# Altium PCB SistemaMonitoreo.PcbDoc
Units mm, origin at the board's own origin, x right, y up, seen from the top; angles counter-clockwise.
Board outline 91.06 x 89.92 mm, 2 copper layers (Top Layer, Bottom Layer); 45 components, 49 nets, 220 pads, 37 vias.
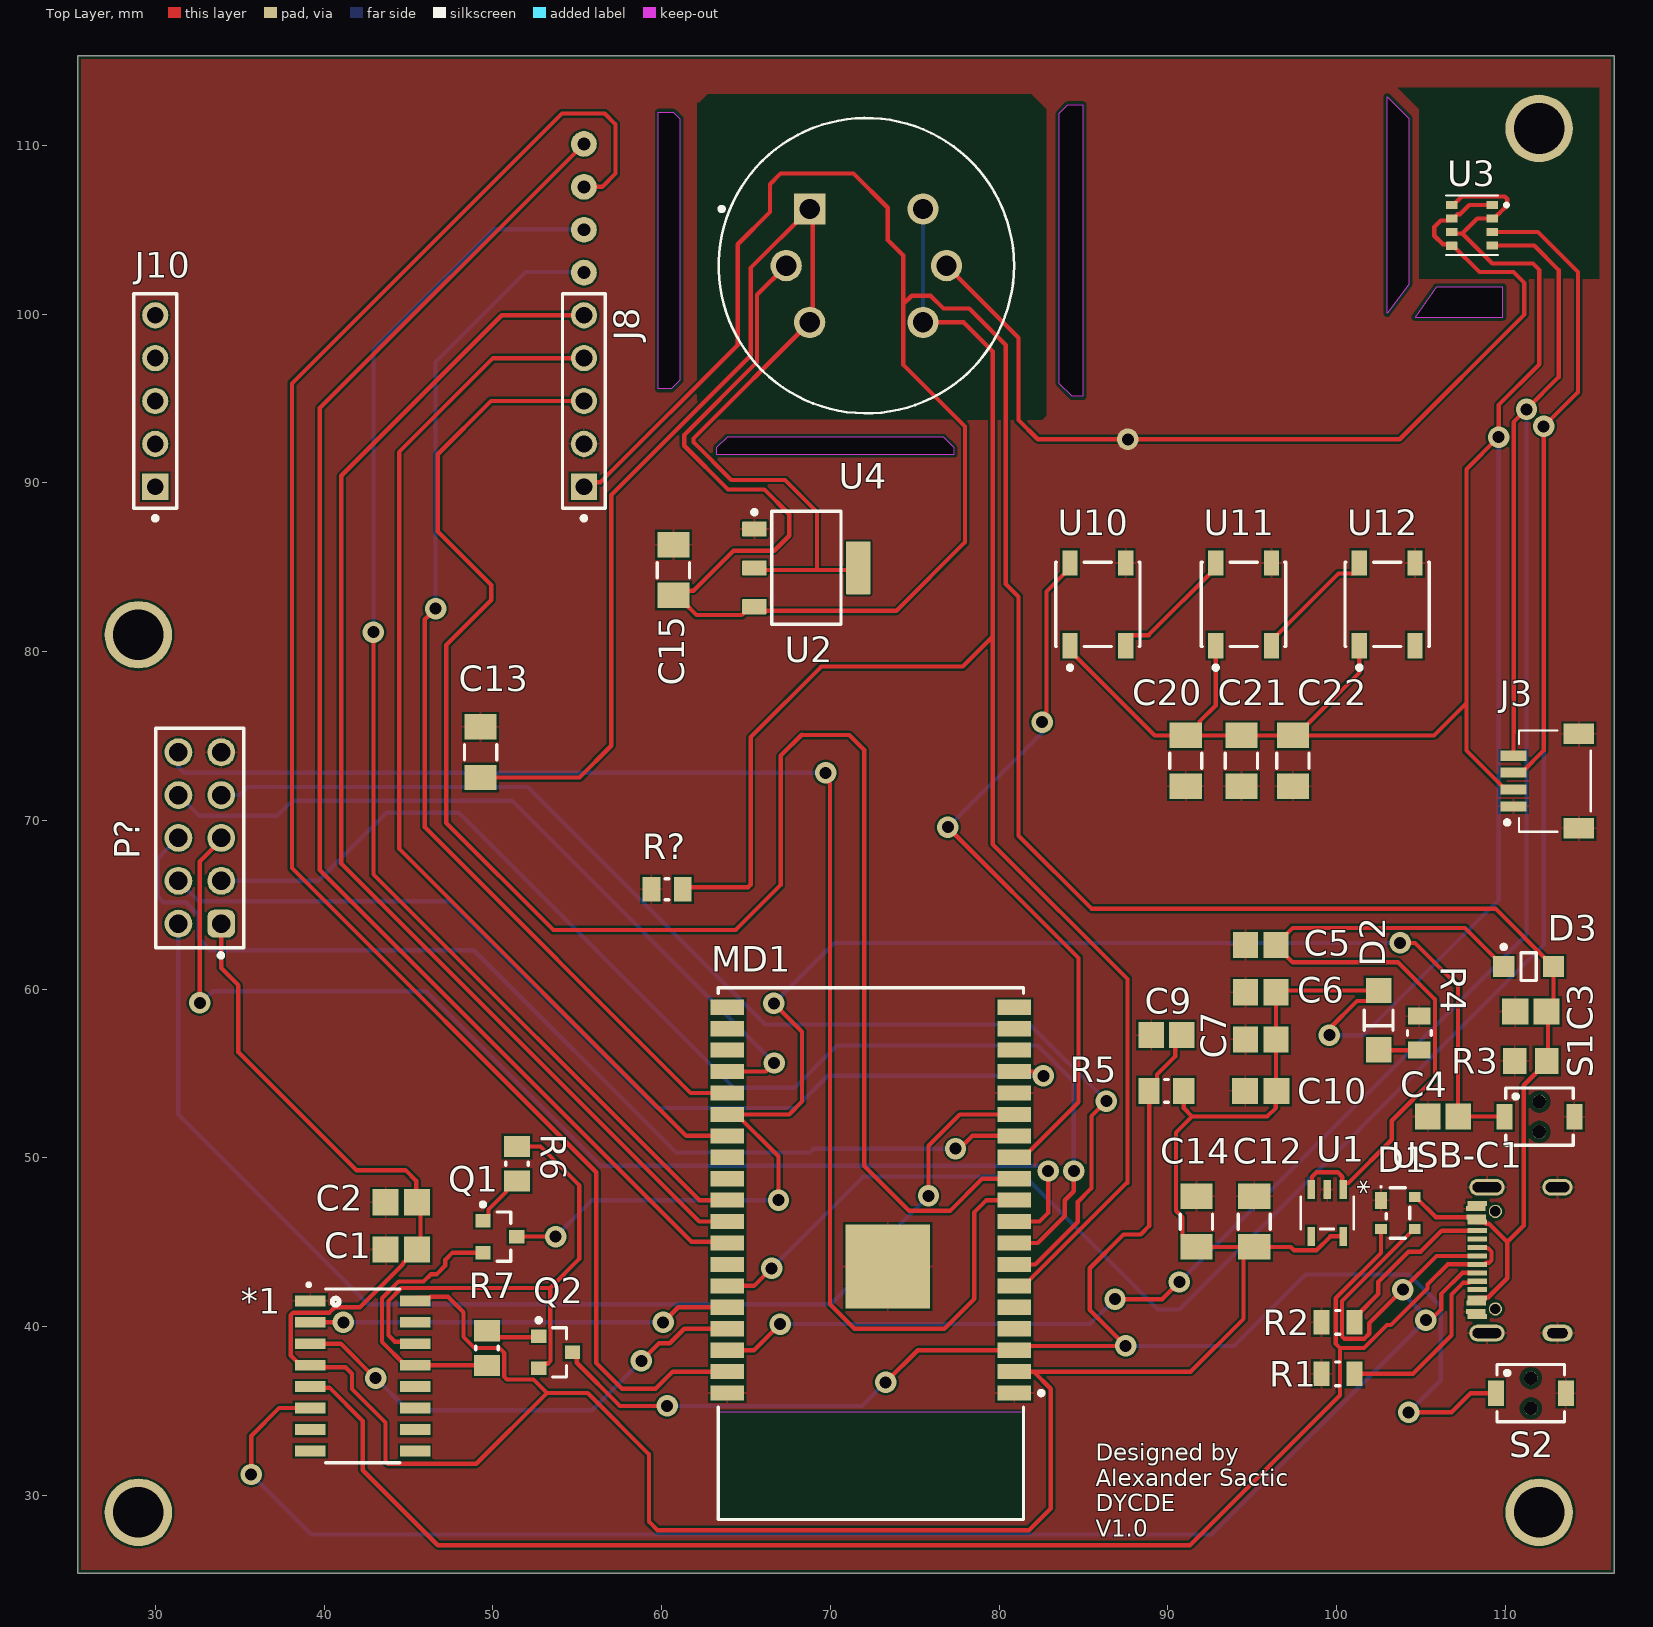
[diagram p0: Top Layer view]
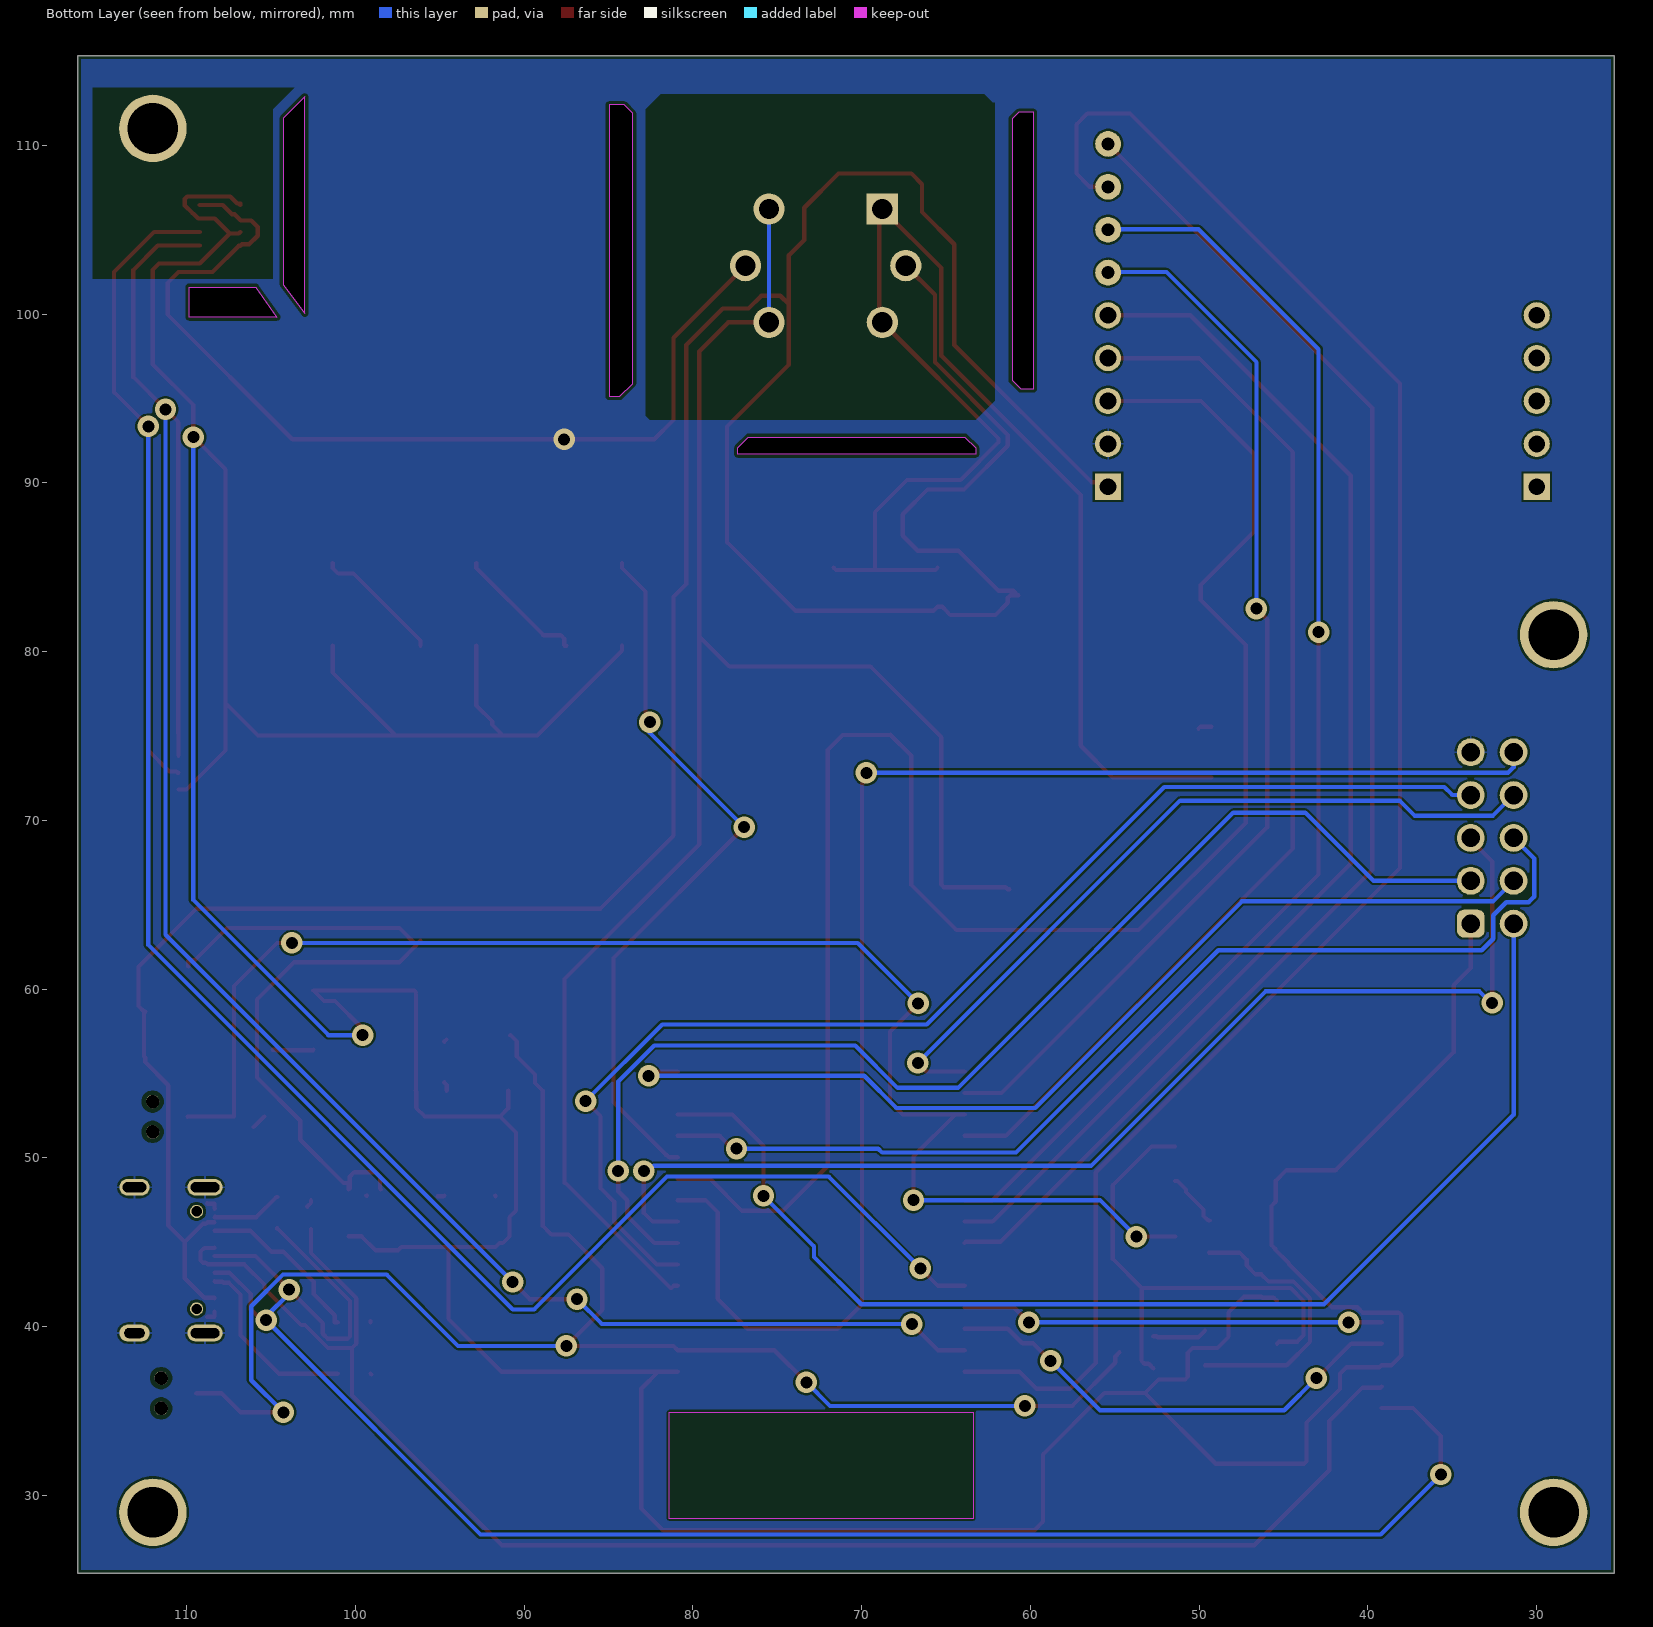
[diagram p1: Bottom Layer view, seen from below]
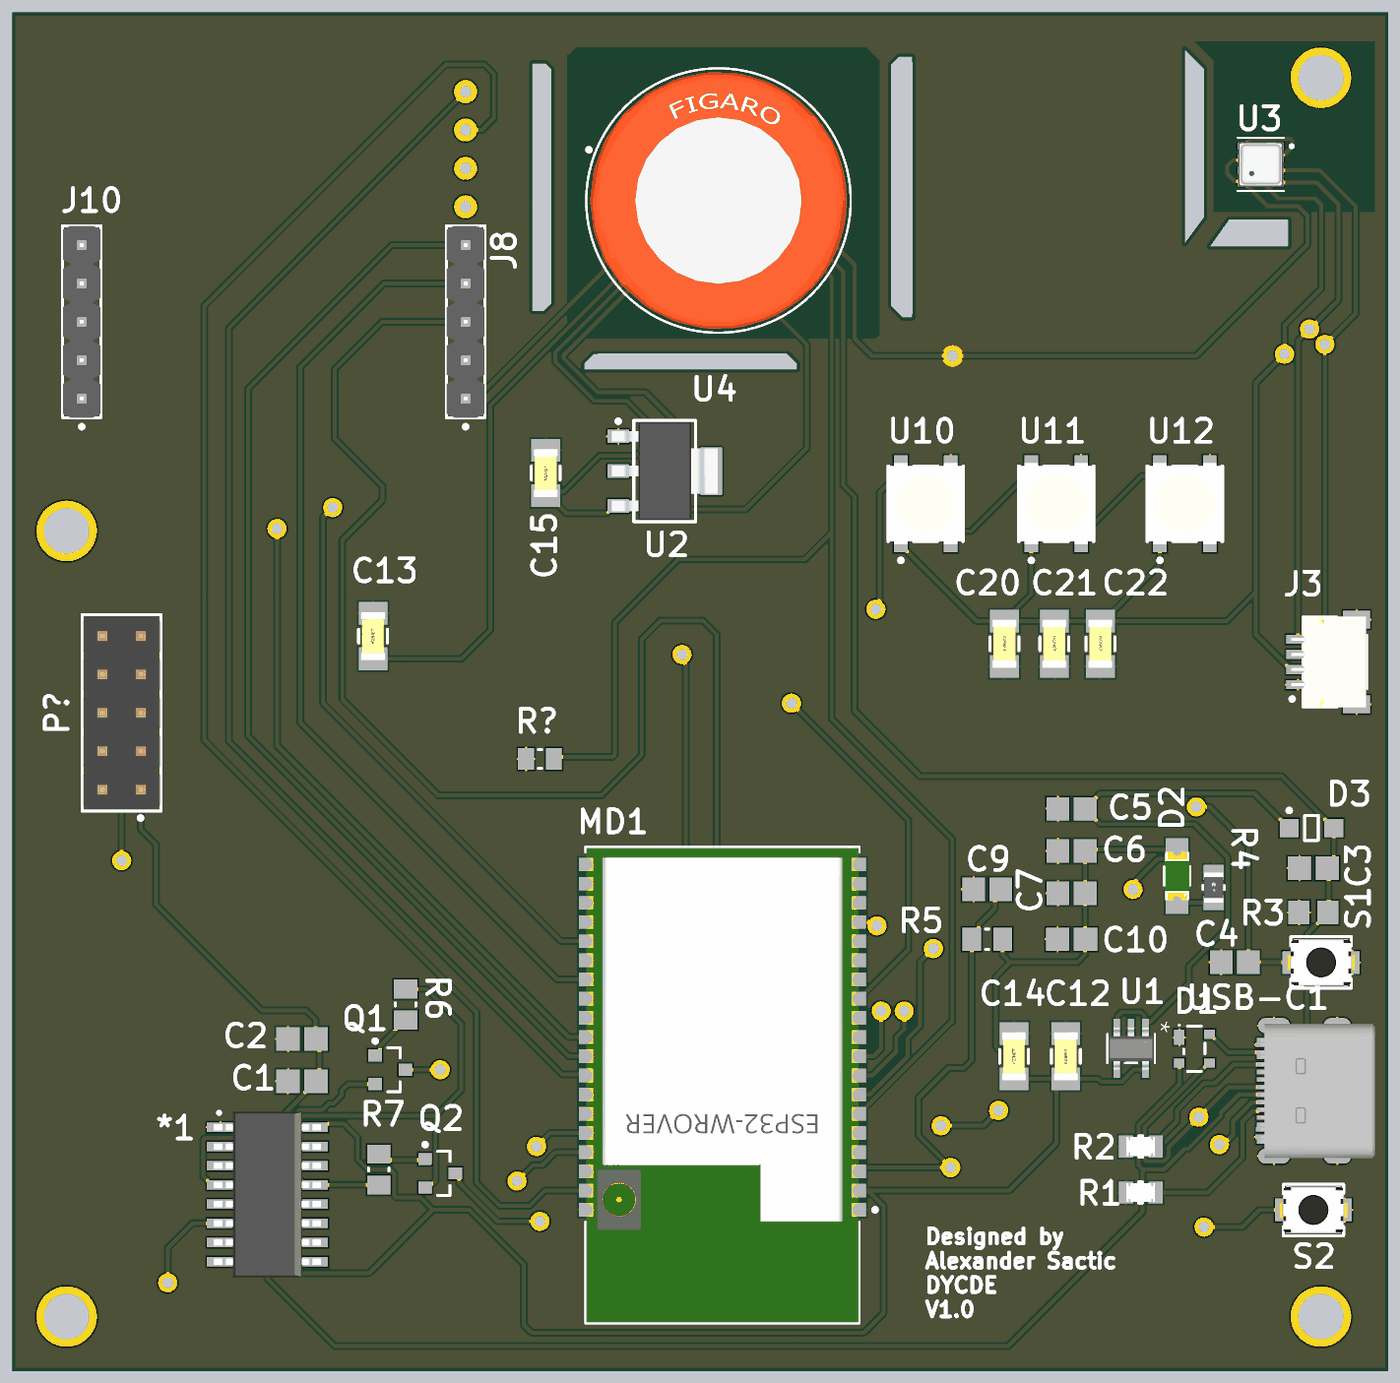
[diagram p2: 3D render of the assembled board from above, using the file's embedded part models]

## Layer stack, top to bottom
Top Solder: solder mask 0.0102, Solder Resist, Dk 3.5
Top Layer: signal copper 0.0356
Dielectric 1: dielectric 0.32, FR-4, Dk 4.8
Bottom Layer: signal copper 0.0356
Bottom Solder: solder mask 0.0102, Solder Resist, Dk 3.5

## Board outline
25.4,25.4 116.459,25.4 116.459,115.316 25.4,115.316
cut-out: 83.566,111.887 84.074,112.395 84.963,112.395 84.963,95.123 84.328,95.123 83.566,95.885
cut-out: 105.918,101.6 104.648,99.822 109.855,99.822 109.855,101.6
cut-out: 63.881,92.71 63.246,92.075 63.246,91.694 77.343,91.694 77.343,92.075 76.708,92.71 76.454,92.71
cut-out: 102.997,112.878 104.267,111.608 104.267,101.752 102.997,100.047
cut-out: 59.817,111.95 60.706,111.95 61.087,111.569 61.087,96.075 60.706,95.694 60.579,95.567 59.817,95.567

## Design rules (kind name [scope] priority, off if disabled: settings)
BoardOutlineClearance [All] p1: gap=0.2 ignorepadtopadclearanceinfootprint=FALSE
Clearance [All] p1: gap=0.127 ignorepadtopadclearanceinfootprint=FALSE except(0.25: Arc-Hole Track-Hole SMDPad-Hole THPad-Hole Via-Hole Fill-Hole Poly-Hole Region-Hole Text-Hole)
ComponentClearance [All] p1: gap=0.127 collisioncheckmode=3 verticalgap=0.127 showdistances=TRUE
DiffPairsRouting [All] p1: maxlimit=0.254 minlimit=0.127 mostfreqgap=0.127 toplayer_minwidth=0.127 toplayer_maxwidth=25.4 toplayer_prefwidth=0.127 bottomlayer_minwidth=0.127 bottomlayer_maxwidth=25.4 bottomlayer_prefwidth=0.127 maxuncoupledlength=12.7
Height [All] p1: minheight=0 maxheight=1816.048 prefheight=12.7
HoleSize [All] p1: absolutevalues=TRUE maxlimit=6.3 minlimit=0.3 maxpercent=80.000 minpercent=20.000
HoleToHoleClearance [All] p1: gap=0.25 allowstackedmicrovias=FALSE
MinimumAnnularRing [All] p1: minimumring=0.076
MinimumSolderMaskSliver [All] p1: minsoldermaskwidth=0
PlaneClearance [All] p1: clearance=0.127
PlaneConnect PlaneConnectPowerPads [InPadClass('PowerPads')] p1: planeconnectstyle=Direct reliefexpansion=0.508 reliefentries=4 reliefconductorwidth=0.254 reliefairgap=0.254
PlaneConnect [All] p2: pad.planeconnectstyle=Relief pad.reliefexpansion=0.3 pad.reliefentries=4 pad.reliefconductorwidth=0.127 pad.reliefairgap=0.127 via.planeconnectstyle=Direct via.reliefexpansion=0.3 via.reliefentries=4 via.reliefconductorwidth=0.127 via.reliefairgap=0.127
PolygonConnect PolygonConnectPowerPads [All vs (InPadClass('PowerPads'))] p1: connectstyle=Direct reliefconductorwidth=0.254 reliefentries=4 polygonreliefangle="90 Angle" airgapwidth=0.254
PolygonConnect [All] p2: thpad.connectstyle=Relief thpad.reliefconductorwidth=0.127 thpad.reliefentries=4 thpad.polygonreliefangle="90 Angle" thpad.airgapwidth=0.127 smdpad.connectstyle=Relief smdpad.reliefconductorwidth=0.127 smdpad.reliefentries=4 smdpad.polygonreliefangle="90 Angle" smdpad.airgapwidth=0.127 via.connectstyle=Direct via.reliefconductorwidth=0.127 via.reliefentries=4 via.polygonreliefangle="90 Angle" via.airgapwidth=0.127
RoutingVias [All] p1: holewidth=0.3 width=0.6 viastyle="Through Hole" minholewidth=0.3 minwidth=0.6 maxholewidth=0.6 maxwidth=6.6
SilkToSilkClearance [All] p1: silktosilkclearance=0
SilkToSolderMaskClearance [IsPad] p1: minsilkscreentomaskgap=0.127 clearancetoexposedcopper=TRUE
SolderMaskExpansion [All] p1: expansion=0.075 istentingtop=FALSE
Width [All] p1: maxlimit=25.4 minlimit=0.127 preferedwidth=0.127 minimp=50.000000 maximp=50.000000 favimp=50.000000
20 further rules are at their usual default settings.

## Classes and differential pairs
component class Main: J8 J10
component class Designator: *1 C1 C2 C3 C4 C5 C6 C7 C9 C10 D1 D2 D3 J3 MD1 P? Q1 Q2 R1 R2 R3 R4 R5 R6 R7 S1 S2 U1 USB-C1

## Components (designator, comment, footprint, x,y, rotation, side; value= is the part's Value field where it differs from the comment)
*1 "CH340B" CH340B 42.291,37.084 r0 top
C1 "0.1 uF" CAPC2013X94X50ML20T25 44.577,44.577 r0 top
C2 "08055C104KAT2A" CAPC2013X94X50ML20T25 44.577,47.371 r0 top
C3 "08055C104KAT2A" CAPC2013X94X50ML20T25 111.506,58.674 r0 top
C4 "1µF" CAPC2013X145X50ML20T25 106.299,52.451 r0 top
C5 "10µF" CAPC2013X140X50ML20T25 95.504,62.611 r0 top
C6 "10µF" CAPC2013X140X50ML20T25 95.504,59.817 r0 top
C7 "1µF" CAPC2013X145X50ML20T25 95.504,57.023 r0 top
C9 "10µF" CAPC2013X145X50ML20T25 89.916,57.277 r0 top
C10 "0.1 uF" CAPC2013X94X50ML20T25 95.504,53.975 r0 top
C12 "C1206C102KGRACTU" FP-C1206C-EF-IPC_A 95.123,46.228 r90 top
C13 "C1206C102KGRACTU" FP-C1206C-EF-IPC_A 49.276,74.041 r90 top
C14 "C1206C102KGRACTU" FP-C1206C-EF-IPC_A 91.694,46.228 r90 top
C15 "C1206C102KGRACTU" FP-C1206C-EF-IPC_A 60.706,84.836 r90 top
C20 "C1206C102KGRACTU" FP-C1206C-EF-IPC_A 91.059,73.533 r270 top
C21 "C1206C102KGRACTU" FP-C1206C-EF-IPC_A 94.361,73.533 r270 top
C22 "C1206C102KGRACTU" FP-C1206C-EF-IPC_A 97.409,73.533 r270 top
D1 "PRTR5V0U2X,215" NXP-SOT143B-4_V 103.632,46.736 r0 top
D2 "HSMG-C150" FP-HSMG-C150-MFG 102.489,58.166 r90 top
D3 "MBR120ESFT1G" ONSC-SOD-123FL-2-498_V 111.379,61.341 r0 top
J3 "SM04B-SRSS-TB(LF)(SN)" JST_SM04B-SRSS-TB(LF)(SN) 110.484,72.328 r90 top
J8 "90120-0125" FP-90120-0125-MFG 55.4,94.85 r90 top
J10 "90120-0125" FP-90120-0125-MFG 30,94.85 r90 top
MD1 "ESP32-WROVER-I" FP-ESP32-WROVER-I-MFG 72.399,44.328 r180 top
P? "61301021121" 61301021121 32.639,68.961 r90 top
Q1 "MMBT2222ALT1G" ONSC-SOT-23-3-318-08_V 50.419,45.339 r0 top
Q2 "MMBT2222ALT1G" ONSC-SOT-23-3-318-08_V 53.721,38.481 r0 top
R1 "5.1K" FP-CRCW0805-e3-MFG 100.076,37.211 r0 top
R2 "5.1K" FP-CRCW0805-e3-MFG 100.076,40.259 r0 top
R3 "100k" RESC2013X60X40ML20T25 111.506,55.753 r0 top
R4 "RP73D2A80R6BTG" FP-RP732A-MFG 104.902,57.404 r270 top value=80.6Ω
R5 "10 k" RESC2013X60X30ML20T20 89.916,53.975 r0 top
R6 "10 k" RESC2013X60X30ML20T20 51.435,49.657 r90 top
R7 "10 k" RESC2013X60X30ML20T20 49.657,38.735 r270 top
R? "RK73B2ATTD103J" RESC2013X60X30NL20T20 60.325,65.913 r0 top
S1 "IO0" SMT_SW_PTS_820 112.014,52.44 r0 top
S2 "PTS820J25MSMTRLFS" SMT_SW_PTS_820 111.506,36.057 r0 top
U1 "XC6210B332MR-G" SOT-25_TOR-M 99.441,46.742 r270 top
U2 "LM1117MPX-3.3/NOPB" DCY0004A_L 68.58,84.963 r0 top
U3 "BME688" BME680 105.48,102.724 r0 top
U4 "TGS822" FP-TGS822-MFG 72.136,102.87 r0 top
U10 "1655" ADA-RGB-1655_V 85.852,82.804 r90 top
U11 "1655" ADA-RGB-1655_V 94.488,82.804 r90 top
U12 "1655" ADA-RGB-1655_V 102.997,82.804 r90 top
USB-C1 "U262-161N-4BVC11" U262-161N-4BVC11 112.014,43.942 r90 top locked

## Footprints (in the part's own frame and the unit in brackets; to place one, negate y for a bottom-side part, rotate by r counter-clockwise, add the part's x,y. Pads: shape width x height; smd on the part's side, far side on the other; paste and mask are expansions set on the pad)
61301021121 [mm] "Pin Header, pitch 2.54 mm, THT, Vertical, dual row, 10p"
  rrect50% 1.65x1.65 hole 1.1: 1(-5.08,-1.27)
  round 1.65 hole 1.1: 2(-5.08,1.27) 3(-2.54,-1.27) 4(-2.54,1.27) 5(0,-1.27) 6(0,1.27) 7(2.54,-1.27) 8(2.54,1.27) 9(5.08,-1.27) 10(5.08,1.27)
  silkscreen extent -7.08,-2.62 6.5,2.62, body extent -6.35,-2.54 6.35,2.54, height 8.59
ADA-RGB-1655_V [mm] "SMD, 4-Leads, Body 5x5mm"
  rect 1.5x0.9 smd: 1(-2.45,1.65) 2(-2.45,-1.65) 3(2.45,-1.65) 4(2.45,1.65)
  silkscreen extent -3.87,-2.5 2.5,2.5, body extent -2.7,-2.5 2.7,2.5, height 1.68
BME680 [mm]
  rrect25% 0.686x0.5 smd: 1(3.74,3.74) 2(3.74,2.94) 3(3.74,2.14) 4(3.74,1.34) 5(1.34,1.32) 6(1.34,2.14) 7(1.34,2.94) 8(1.34,3.74)
  silkscreen extent 1.01,0.77 4.68,4.31, body extent 1.04,1.04 4.04,4.04, height 1
CAPC2013X94X50ML20T25 [mm] "Chip Capacitor, 2-Leads, Body 2.01x1.25mm, IPC Low Density"
  rect 1.55x1.55 smd: 1(-0.925,0) 2(0.925,0)
  body extent -1.1,-0.72 1.11,0.72, height 0.94
CAPC2013X140X50ML20T25 [mm] "Chip Capacitor, 2-Leads, Body 2.00x1.25mm, IPC Low Density"
  rect 1.5x1.55 smd: 1(-0.9,0) 2(0.9,0)
  body extent -1.1,-0.72 1.1,0.72, height 1.4
CAPC2013X145X50ML20T25 [mm] "Chip Capacitor, 2-Leads, Body 2.00x1.25mm, IPC Low Density"
  rect 1.5x1.55 smd: 1(-0.9,0) 2(0.9,0)
  body extent -1.1,-0.72 1.1,0.72, height 1.45
CH340B [mm] "- USB 2.0 Transceiver 2Mbps SOP-16_150mil USB ICs ROHS"
  rect 1.8x0.64 smd: 1(-3.105,4.445) 2(-3.105,3.175) 3(-3.105,1.905) 4(-3.105,0.635) 5(-3.105,-0.635) 6(-3.105,-1.905) 7(-3.105,-3.175) 8(-3.105,-4.445) 9(3.105,-4.445) 10(3.105,-3.175) 11(3.105,-1.905) 12(3.105,-0.635) 13(3.105,0.635) 14(3.105,1.905) 15(3.105,3.175) 16(3.105,4.445)
  silkscreen extent -3.3,-5.15 2.2,5.5, body extent -3.56,-5.51 3.56,5.51, height 2.14
DCY0004A_L [mm] "SOT223, 4-Leads, Body 6.7x3.7mm, Pitch 2.3mm, IPC High Density"
  rrect11% 1.45x0.9 smd: 1(-3.075,2.3) 2(-3.075,0) 3(-3.075,-2.3)
  rrect7% 1.45x3.15 smd: 4(3.075,0)
  silkscreen extent -3.2,-3.35 2.05,3.42, body extent -3.5,-3.25 3.5,3.25, height 1.62
FP-90120-0125-MFG [mm]
  rect 1.55x1.55 hole 1 paste-2539.97 mask+0: 1(-5.08,0)
  round 1.55 hole 1 paste-2539.97 mask+0: 2(-2.54,0) 3(0,0) 4(2.54,0) 5(5.08,0)
  silkscreen extent -7.07,-1.27 6.35,1.27, body extent -6.45,-1.37 6.45,1.37, height 0.25
FP-C1206C-EF-IPC_A [mm]
  rect 1.505x1.906 smd paste+0 mask+0: 1(-1.501,0) 2(1.501,0)
  silkscreen extent -0.45,-0.95 0.45,0.95, body extent -2.75,-1.45 2.75,1.45, height 0.25
FP-CRCW0805-e3-MFG [mm]
  rect 0.95x1.45 smd paste+0 mask+0: 1(-0.975,0) 2(0.975,0)
  silkscreen extent -0.13,-0.7 0.13,0.7, body extent -1.55,-0.82 1.55,0.82, height 0.25
FP-ESP32-WROVER-I-MFG [mm]
  rect 2x0.9 smd paste+0 mask+0: 1(-8.5,8.26) 2(-8.5,6.99) 3(-8.5,5.72) 4(-8.5,4.45) 5(-8.5,3.18) 6(-8.5,1.91) 7(-8.5,0.64) 8(-8.5,-0.63) 9(-8.5,-1.9) 10(-8.5,-3.17) 11(-8.5,-4.44) 12(-8.5,-5.71) 13(-8.5,-6.98) 14(-8.5,-8.25) 15(-8.5,-9.52) 16(-8.5,-10.79) 17(-8.5,-12.06) 18(-8.5,-13.33) 19(-8.5,-14.6) 20(8.5,-14.6) 21(8.5,-13.33) 22(8.5,-12.06) 23(8.5,-10.79) 24(8.5,-9.52) 25(8.5,-8.25) 26(8.5,-6.98) 27(8.5,-5.71) 28(8.5,-4.44) 29(8.5,-3.17) 30(8.5,-1.9) 31(8.5,-0.63) 32(8.5,0.64) 33(8.5,1.91) 34(8.5,3.18) 35(8.5,4.45) 36(8.5,5.72) 37(8.5,6.99) 38(8.5,8.26)
  rect 5x5 smd paste+0 mask+0: 39(-1,0.76)
  Keep-Out Layer region: -9,9.4 9,9.4 9,15.7 -9,15.7
  Keep-Out Layer region: -9,9.4 9,9.4 9,15.7 -9,15.7
  silkscreen extent -10.23,-15.75 9.05,15.75, body extent -9.6,-15.85 9.6,15.85, height 0.25
FP-HSMG-C150-MFG [mm]
  rect 1.5x1.5 smd paste+0 mask+0: 1(-1.75,0) 2(1.75,0)
  silkscreen extent -0.6,-0.85 0.6,0.85, body extent -2.6,-0.95 2.6,0.95, height 0.25
FP-RP732A-MFG [mm]
  rect 1x1.35 smd paste+0 mask+0: 1(-1,0) 2(1,0)
  silkscreen extent -0.13,-0.7 0.13,0.7, body extent -1.6,-0.8 1.6,0.8, height 0.25
FP-TGS822-MFG [mm]
  rect 1.85x1.85 hole 1.2 paste-2539.97 mask+0: 1(-3.359,3.359)
  round 1.85 hole 1.2 paste-2539.97 mask+0: 2(-4.75,0) 3(-3.359,-3.359) 4(3.359,-3.359) 5(4.75,0) 6(3.359,3.359)
  silkscreen extent -8.75,-8.75 8.75,8.75, body extent -8.85,-8.85 8.85,8.85, height 0.25
JST_SM04B-SRSS-TB(LF)(SN) [mm]
  rect 0.6x1.55 smd: 1(-1.5,0) 2(-0.5,0) 3(0.5,0) 4(1.5,0)
  rect 1.2x1.8 smd: S1(-2.8,-3.875) S2(2.8,-3.875)
  silkscreen extent -3,-4.57 3,0.48, body extent -3,-4.5 3,0.45, height 2.98
NXP-SOT143B-4_V [mm] "SOT143, 4-Leads, Body 3x1.4mm"
  rect 0.7x1 smd: 1(-1,0.75)
  rect 0.7x0.6 smd: 2(-1,-0.95) 3(1,-0.95) 4(1,0.95)
  silkscreen extent -1.05,-1.5 0.7,1.6, body extent -0.7,-1.5 0.7,1.5, height 1.1
ONSC-SOD-123FL-2-498_V [mm] "SOD, 2-Leads, Body 2.7x1.65mm"
  rect 1.25x1.22 smd: 1(-1.475,0) 2(1.475,0)
  silkscreen extent -1.6,-0.82 0.45,1.28, body extent -1.35,-0.82 1.35,0.82, height 0.98
ONSC-SOT-23-3-318-08_V [mm] "SOT23, 3-Leads, Body 2.92x1.3mm, Pitch 0.95mm"
  rect 0.9x0.8 smd: 1(-1,0.95) 2(-1,-0.95) 3(1,0)
  silkscreen extent -1.12,-1.46 0.65,2.02, body extent -0.65,-1.46 0.65,1.46, height 1.11
RESC2013X60X30ML20T20 [mm] "Chip Resistor, 2-Leads, Body 2.00x1.25mm, IPC Low Density"
  rect 1.25x1.55 smd: 1(-1.025,0) 2(1.025,0)
  silkscreen extent -0.1,-0.67 0.1,0.67, body extent -1.1,-0.72 1.1,0.72, height 0.6
RESC2013X60X30NL20T20 [mm] "Chip Resistor, 2-Leads, Body 2.00x1.25mm, IPC Medium Density"
  rect 1.05x1.45 smd: 1(-0.925,0) 2(0.925,0)
  silkscreen extent -0.1,-0.62 0.1,0.62, body extent -1.1,-0.72 1.1,0.72, height 0.6
RESC2013X60X40ML20T25 [mm] "Chip Resistor, 2-Leads, Body 2.00x1.25mm, IPC Low Density"
  rect 1.4x1.55 smd: 1(-0.95,0) 2(0.95,0)
  body extent -1.1,-0.72 1.1,0.72, height 0.6
SMT_SW_PTS_820 [mm]
  rect 0.95x1.5 smd: 1(-2.075,0) 2(2.075,0)
  round 0.8 hole 0.8 unplated: MH1(0,0.9) MH2(0,-0.9)
  silkscreen extent -2,-1.7 2,1.7, body extent -2.25,-1.55 2.25,1.55, height 2.05
SOT-25_TOR-M [mil]
  rect 44.5x17 smd paste+0 mask+0: 1(-54.75,37.4) 2(-54.75,0) 3(-54.75,-37.4) 4(54.75,-37.4) 5(54.75,37.4)
  silkscreen extent -38,-62 38,62, body extent -55,-57 55,57, height 51
U262-161N-4BVC11 [mm] "USB-C"
  rect 0.3x1.15 smd: A1(-3.35,3.67) A4(-2.55,3.734) A5(-1.25,3.67) A6(-0.25,3.67) A7(0.25,3.67) A8(1.25,3.67) A9(2.55,3.734) A12(3.35,3.67) B1(3.05,3.764) B4(2.25,3.67) B5(1.75,3.67) B6(0.75,3.67) B7(-0.75,3.67) B8(-1.75,3.67) B9(-2.25,3.67) B12(-3.05,3.764)
  rrect100% 1x1.8 hole 1.2 slot 0.6 at 0 deg: S1(-4.32,-1.075)
  rrect100% 1x1.8 on Top Paste: S1(-4.318,-1.092) S1(4.318,-1.067)
  rrect100% 1x2.1 hole 1.7 slot 0.6 at 0 deg: S2(-4.32,3.105) S3(4.32,3.105)
  rrect100% 1x2.1 on Top Paste: S2(-4.318,3.124) S2(4.318,3.124)
  rrect100% 1x1.8 hole 1.4 slot 0.6 at 0 deg: S4(4.32,-1.075)
  round 0.78 / inner round 0 / far side round 0.78 hole 0.61: Un1(2.89,2.605)
  round 0.78 / inner round 0.65 / far side round 0.78 hole 0.61: Un2(-2.89,2.605)
  body extent -4.45,-3.55 4.45,4.01, height 3.33

## Part data
*1: "- USB 2.0 Transceiver 2Mbps SOP-16_150mil USB ICs ROHS", ComponentLink1Description=Datasheet, ComponentLink1URL=https://www.mpja.com/download/35227cpdata.pdf
C1 C2 C3 C10: library part CMP-2000-05016-1, "Chip Capacitor, Ceramic, 0.1 uF, 10%, 50 V, 0805, RoHS, Tape and Reel", Capacitance=100nF, Case Size/Dimension=0805, Dielectric=X7R, Manufacturer=AVX, Rated Voltage=50V, Tolerance (%)=±10%, Datasheet URL=http://www.farnell.com/datasheets/319609.pdf, Datasheet Version=Sep-07, Manufacturer URL=http://www.avx.com/
C4 C7 C9: library part CMP-2007-01082-1, "1µF ±10% 16V Ceramic Capacitor X7R 0805 (2012 Metric)", Manufacturer=Kemet, Part Number=C0805C105K4RAC7800
C5 C6: library part CMP-2007-03242-1, "10µF ±10% 16V Ceramic Capacitor X5R 0805 (2012 Metric)", Part Number=CL21A106KOQNNNG
C12 C13 C14 C15 C20 C21 C22: library part CMP-03020-034681-1, "CAP CER 1000PF 2KV X7R 1206", Capacitance=1nF, Case Code (Imperial)=1206, Case Code (Metric)=3216, Dielectric=X7R, Dielectric Material=Ceramic, Max Operating Temperature=125°C, Min Operating Temperature=-55°C, Package Quantity=1, Tolerance=10%, Voltage=2kV, Voltage Rating (DC)=2.5kV, Case/Package=1206, Construction=Flat, Depth=1.6mm, Dissipation Factor=2.5%, Height=1.6mm, Length=3.2mm, Mount="Surface Mount", Number of Pins=2, Packaging="Tape and Reel", Radiation Hardening=No, REACH SVHC="No SVHC", RoHS Compliant=Yes, Series=C, Termination=SMD/SMT, Thickness=0.069inch, Voltage Rating=2kV, Width=0.063inch
D1: library part CMP-2000-05285-1, "Ultra Low Capacitance Double Rail-to-Rail ESD Protection Diode, 5.5 V, 1 pF, -40 to 85 degC, 4-Pin SOT143B, RoHS, Tape and Reel", Capacitance Value=16pF, ESD Protection Voltage=8KV@ContactDisc, Leakage Current=0.1uA, Manufacturer="NXP Semiconductors", Operating Temp Range=-40Cto85C, Operating Temperature Classification=Industrial, Operating Temperature Max Deg. C=85C, Operating Temperature Min Deg. C=-40C, Package / Case=SOT, Reverse Breakdown Voltage=6V, Reverse Stand-off Voltage=5.5V, Configuration=Quad, Datasheet URL=https://datasheet.ciiva.com/4479/prtr5v0u2x-102853-4479461.pdf, Datasheet Version="Rev. 02, 01/2008", Direction Type=Uni-Directional, Leakage Current (Max)=0.1uA, Manufacturer URL=http://www.nxp.com/, Mounting=SurfaceMount, Mounting Style=SurfaceMount, Number of Elements=1, Package Type=SOT, Packaging=TapeandReel, Pin Count=3+Tab, Polarity=Uni-Directional, Product Depth (mm)=1.4mm, Product Height (mm)=1mm, Product Length (mm)=3mm, Rad Hardened=No, Suppressor Type=DiodeArrays, Working Voltage=5.5V, Working Voltage (Max)=5.5V
D2: library part CMP-2000-05061-2, "LED GREEN DIFFUSED 1206 SMD", Colour=Green, Forward Current=20mA, Forward Voltage=2.2V, Manufacturer=Broadcom, Max Junction Temp=+95°C, Power Dissipation=65mW, Reverse Voltage=5V, Temperature="-40°C to +85°C", Temperature Range High=+85°C, Temperature Range Low=-40°C, Automotive=No, Category=Diode, ComponentLink2Description=Datasheet, ComponentLink2URL=https://docs.broadcom.com/docs/AV02-0551EN, Device Class L1=Optoelectronics, Device Class L2=LEDs, Device Class L3=unset, Digikey Description="LED GREEN DIFFUSED 1206 SMD", Height=1.2mm, Ipc Land Pattern Name=DIOCP320160X55, Lead Free=Yes, Led Orientation="Top View", Luminous Intensity=15mcd, Manufacturer Part Number=HSMG-C150, Mouser Description="LED Uni-Color Green 570nm 2-Pin Chip LED T/R", Octopart=https://octopart.com/hsmg-c150-broadcom-71131304, Package=HSMG-C150, Peak Emmision Wavelength=570nm, RoHS=TRUE, Viewing Angle=170°, Wavelength=572nm
D3: library part CMP-1055-00434-1, "Schottky Power Rectifier, 2-Pin SOD-123, Pb-Free, Tape and Reel", Manufacturer="On Semiconductor", ComponentLink1Description="Manufacturer URL", ComponentLink1URL=http://www.onsemi.com/, ComponentLink2Description=Datasheet, ComponentLink2URL=http://www.onsemi.cn/pub_link/Collateral/MBR120ESFT1-D.PDF, ComponentLink3Description="Package Specification", ComponentLink3URL=http://www.onsemi.com/pub_link/Collateral/498-01.PDF, Configuration=Single, DatasheetVersion="Rev. 4", IFSM Max (A)=40, Mounting Technology="Surface Mount", PackageDescription="2-Pin SOD, Body 1.65 x 2.7 mm", PackageReference=SOD-123FL-2-498, PackageVersion="Rev. D, 05/2013", Packing="Tape and Reel", PartNumber=MBR120ESFT1G, RoHS=TRUE
J3: "Connector Header Surface Mount, Right Angle 4 position 0.039 _1.00mm_", Package=None, Availability=Unavailable, MF="JST Sales", MP=SM04B-SRSS-TB_LF__SN_, Price=None, SnapEDA_Link=https://www.snapeda.com/parts/SM04B-SRSS-TB%28LF%29%28SN%29/JST%20Sales%20America%20Inc./view-part/557466/?ref=snap
J8 J10: library part CMP-00257-00655425-1, "90120-0125 2.54mm Pitch C-Grid III Header, Single Row, Vertical, 5 Circuits, Tin (Sn) Plating", Contact Resistance=20mΩ, Current Rating=3A, Housing Color=Black, Manufacturer Lifecycle Status=ACTIVE, Max Operating Temperature=125°C, Max Voltage Rating (DC)=350.35kV, Min Operating Temperature=-55°C, Voltage Rating=350V, Contact Gender=Male, Contact Material=Brass, Contact Plating=Tin, Country of Origin=SK, Gender=Male, Glow Wire Compliant=Non-compliant, Housing Material=Polyester, Lead Free="Lead Free", Lead Length=2.9mm, Lead Pitch=2.54mm, Lifecycle Status=Production, Mating Post Length=6.75mm, Mount="Through Hole", NexarPartId=655425, Number of Circuits=5, Number of Contacts=5, Number of Pins=5, Number of Positions=5, Number of Rows=1, Orientation=Vertical, Packaging=Bulk, Pitch=2.54mm, Plating=Tin, Radiation Hardening=No, REACH SVHC="No SVHC", RoHS=Compliant, Schedule B=8536694040, Termination=Solder, Voltage Rating (AC)=350V
MD1: library part CMP-194065-000001-1, "SMD MODULE, ESP32-D0WDQ6, 32MBIT", Manufacturer=Espressif, Max Frequency=2484MHz, Max Supply Voltage=3.6V, Min Supply Voltage=2.3V, Nominal Supply Current=500mA, Temperature="-40°C to +85°C", Temperature Range High=+85°C, Temperature Range Low=-40°C, Automotive=No, Category=UNK, ComponentLink2Description=Datasheet, ComponentLink2URL=https://www.espressif.com/sites/default/files/documentation/esp32-wrover_datasheet_en.pdf, Data Rate=150Mbits/s, Device Class L1="Integrated Circuits (ICs)", Device Class L2="RF Semiconductors and Devices", Device Class L3=Transceivers, Digikey Description="SMD MODULE, ESP32-D0WDQ6, 32MBIT", Height=3.4mm, Interface=I2C,SPI,UART,I2S,Other, Lead Free=Yes, Manufacturer Part Number=ESP32-WROVER-I, Number Of Adc Channels=16, Number Of Gpio=20, Octopart=https://octopart.com/esp32-wrover-i-espressif+systems-89171349, Package=ESP32-WROVER-I, RoHS=TRUE, Sensitivity=-98dBm
P?: library part CMP-1502-01084-3, Color=Black, Contact Resistance=20mΩ, Current Rating=3A, Flammability Rating="UL94 V-0", Insulation Resistance=1GΩ, Max Operating Temperature=105°C, Min Operating Temperature=-40°C, Operating Supply Voltage=250V, Connector Type="Male Pin", Contact Gender=Male, Contact Material=Copper, Contact Mating Length=5.9944mm, Contact Plating=Gold, Gender=Male, Height=2.54mm, Housing Material=PBT, Insulation=Insulated, Lead Pitch=2.54mm, Length=12.7mm, Mount="Through Hole", NexarPartId=18818163, Number of Contacts=10, Number of Pins=10, Number of Positions=10, Number of Rows=2, Orientation=Vertical, Packaging=Bulk, Pitch=2.54mm, REACH SVHC=Unknown, RoHS=Compliant, Row Spacing=2.54mm, Termination="Through Hole", Voltage Rating=250V, Width=12.7mm
Q1 Q2: library part CMP-1048-00538-1, "General Purpose Transistor, NPN Silicon, 3-Pin SOT-23, Pb-Free, Tape and Reel", Manufacturer="On Semiconductor", ComponentLink1Description="Manufacturer URL", ComponentLink1URL=http://www.onsemi.com/, ComponentLink2Description=Datasheet, ComponentLink2URL=http://www.onsemi.cn/pub_link/Collateral/MMBT2222LT1-D.PDF, ComponentLink3Description="Package Specification", ComponentLink3URL=http://www.onsemi.cn/pub_link/Collateral/318-08.PDF, DatasheetVersion="Rev. 10", fT Min (MHz)=300, IC Continuous (A)=0.6, Mounting Technology="Surface Mount", PackageDescription="3-Pin Small Outline Transistor, Body 2.92 x 1.3 mm, Pitch 0.95 mm", PackageReference=SOT-23-3-318-08, PackageVersion="Rev. AP, 11/2009", Packing="Tape and Reel", PartNumber=MMBT2222ALT1G, Polarity=NPN, RoHS=TRUE
R1 R2: library part CMP-2001-04024-2, "RES Thick Film, 5.1kΩ, 1%, 0.125W, 100ppm/°C, 0805", Case Code (Imperial)=0805, Case Code (Metric)=2012, Max Operating Temperature=155°C, Max Power Dissipation=125mW, Min Operating Temperature=-55°C, Package Quantity=10, Resistance=5.1kR, Temperature Coefficient=100ppm/°C, Tolerance=1%, Voltage Rating=150V, Case/Package=0805, Composition="Thick Film", Contact Plating=Tin, Depth=1.25mm, Features="Automotive AEC-Q200", Height=0.45mm, Lead Free="Lead Free", Length=2mm, Military Standard=Not, Mount="Surface Mount", Number of Terminations=2, Packaging="Tape and Reel", Power Rating=125mW, Radiation Hardening=No, Termination=SMD/SMT, Voltage Rating (DC)=150V, Weight=0.000194oz, Width=0.049inch
R3: library part CMP-2001-00583-1, "100 kOhms ±0.1% 0.125W, 1/8W Chip Resistor 0805 (2012 Metric) Automotive AEC-Q200 Thin Film", Manufacturer=Panasonic, Part Number=ERA6AEB104V
R4: library part CMP-03211-002377-1, "RESISTOR, 0805 80.6Ω, 0.1% 15ppm/°C", Manufacturer="TE Connectivity", Package=RP732A, Power Rating=0.125W, Resistance=80.6Ω, Temperature="-55°C to 155°C", Temperature Coefficient=15ppm/°C, Temperature Range High=155°C, Temperature Range Low=-55°C, Tolerance=0.1%, Voltage Rating=150V, Automotive=No, Category=Res, ComponentLink2Description=Datasheet, ComponentLink2URL=https://www.te.com/commerce/DocumentDelivery/DDEController?Action=srchrtrv&DocNm=1773272&DocType=DS&DocLang=English, Composition="Thin Film", Device Class L1="Passive Components", Device Class L2=Resistors, Device Class L3="Chip SMD Resistors", Height=0.65mm, Ipc Land Pattern Name=RESC200125X55, Lead Free=Yes, Manufacturer Part Number=RP73D2A80R6BTG, Octopart=https://octopart.com/rp73d2a80r6btg-te+connectivity-42011633, octopart_url=https://octopart.com/rp73d2a80r6btg-te+connectivity-42011633, Packaging="250 cut tape length", RoHS=TRUE, Series=RP73
R5 R6 R7: library part CMP-2001-04657-1, "10 kOhms ±5% 0.25W, 1/4W Chip Resistor 0805 (2012 Metric) Automotive AEC-Q200, Moisture Resistant Thick Film", Manufacturer="KOA Speer", Part Number=RK73B2ATTD103J
R?: library part CMP-2001-04657-1, "RL", Manufacturer="KOA Speer", Part Number=RK73B2ATTD103J
S1: library part PTS820J25MSMTRLFS
U1: "No Description Available", Mfr_Name="Torex Semiconductor", Copyright="Copyright (C) 2022 Ultra Librarian. All rights reserved.", Manufacturer_Part_Number=XC6210B332MR-G, RefDes=RefDes, Type=DEV
U2: library part CMP-0062-01639-4, "800mA Low-Dropout Linear Regulator, 4-pin SOT-223, Pb-Free", Manufacturer="Texas Instruments", PackageTopMarking=XYTT*N05A, PowerWise=N, Code_IPC=SOT223-4, Code_JEDEC=TO-261-AA, ComponentLink1Description="Datasheet URL", ComponentLink1URL=http://www.ti.com/general/docs/lit/getliterature.tsp?genericPartNumber=LM1117-N&fileType=pdf, CompType="LDO IC", High-Reliability=Y, PackageDescription="Molded SOT-223, 6.50 x 3.56 x 1.6mm Body, 4 Lead, 2.3mm Pitch", PackageReference=DCY0004A, PartNumber=LM1117MPX-3.3/NOPB, PinCount=4, RoHS=Y
U3: "Gas sensor measuring relative humidity, barometric pressure, ambient temperature and gas (VOC)", Package=None, Availability=Unavailable, MP=BME688, Price=None
U4: library part CMP-04312-24208239-1, "TGS822 MOS-Type organic solvent vapors sensor; range: 50-5000ppm C2H5OH; supply: 5V; power: 660mW", Case/Package=Radial, Max Supply Voltage=24V, Height=10mm, NexarPartId=24208239, RoHS=Compliant
U10 U11 U12: library part CMP-2000-05026-1, "Intelligent Control LED Integrated Light Source, 3.5 to 5.3 V, -25 to 80 degC, 4-Pin SMD, RoHS, Tape and Reel", Color=Red,Green,Blue(RGB), Manufacturer=Adafruit-Industries-LLC, Package Description="4-Pin Surface Mount Device, Body 5 x 5 mm", Category=Optoelectronics, Configuration=Discrete, Controller Type=-, Datasheet URL=http://datasheet.octopart.com/ADA1655-Adafruit-Industries-datasheet-32028139.pdf, Datasheet Version=May-13, Family=Addressable,Specialty, Interface=-, Manufacturer URL=https://www.adafruit.com/, Mounting Type=SurfaceMount, Number of LEDs=10, Package Reference=1655, Series=Neopixel, Size / Dimension=5.00mmLx5.00mmW, Utilized LED=WS2812(5050)
USB-C1: "USB - Type C Female 16 SMT USB Connectors RoHS", ComponentLink1Description=datasheet, ComponentLink1URL=https://datasheet.lcsc.com/szlcsc/2002271811_XKB-Connectivity-U262-161N-4BVC11_C319148.pdf, ComponentLink2Description="LCSC Link", ComponentLink2URL=https://lcsc.com/product-detail/USB-Connectors_XKB-Connectivity-U262-161N-4BVC11_C319148.html

## Free pads (board coordinates)
  round 1.524 hole 0.762: 2(55.4,110.08) 3(55.4,107.54) 4(55.4,105) 5(55.4,102.46)
  round 4 hole 3: 6(29,29) 6(29,81) 6(112,29) 6(112,111)

## Via types
v1: diameter 1.27, hole 0.711, Top Layer to Bottom Layer, 37 vias

## Nets (pads, with @x,y where several pads share a name; then routed paths per layer and width w, separated by ;. In a path a pad name is that pad's centre, name@x,y a point inside that pad or via, vN(x,y) a via of type N, cw(c..) or ccw(c..) an arc to the next point about the centre after c; other vN are vias at no path point)
3V3: *1.4 *1.16 C1.2 C2.2 C6.2 C7.2 C10.2 C12.1 C14.1 C20.1 C21.1 C22.1 D2.2 J3.2 MD1.2 P?.1 R5.2 U1.5 U3.2 U3.6 U3.8 U10.1 U11.1 U12.1 | length 304.3
  Top Layer w0.254: P?.1 33.909,61.252 34.925,60.236 34.925,56.261 41.91,49.276 44.831,49.276 45.466,48.641 45.466,47.407 C2.2 45.72,47.153 45.72,44.831 45.502,44.613 C1.2 44.681,43.756 44.681,43.697 42.132,41.148 40.64,41.148 40.325,40.833 38.181,40.833 38.032,40.684 38.032,38.293 38.606,37.719 *1.4 39.313,37.592 41.275,37.592 41.656,37.211 41.656,36.31 43.64,34.326 43.64,32.026 43.789,31.877 49.022,31.877 53.213,36.068 ; *1.16 45.589,41.722 46.268,41.722 46.318,41.772 47.346,41.772 48.26,40.858 48.26,39.398 48.923,38.735 50.391,38.735 50.686,38.44 50.686,37.026 50.835,36.877 52.404,36.877 53.213,36.068 ; MD1.2 82.042,37.338 ; U10.1 84.202,80.054 89.222,75.034 C20.1 C20.1@91.26,75.034 ; R5.2 90.941,52.95 91.44,52.451 ; C14.1 91.463,44.958 91.262,44.958 90.868,45.353 90.868,46.49 90.487,46.871 90.487,51.498 91.44,52.451 ; C14.1@91.717,44.727 C12.1@94.488,44.727 ; U11.1 92.838,76.813 91.885,75.86 91.885,75.659 C20.1@91.26,75.034 ; C6.2@96.404,59.679 C7.2 96.404,54 C10.2 96.402,53.948 96.402,52.968 95.885,52.451 91.44,52.451 ; C6.2 96.503,59.916 D2.2 101.866,59.293 101.203,59.293 99.568,57.658 v1(99.568,57.277) ; U1.5 99.631,45.352 98.812,44.533 97.478,44.533 97.283,44.727 C12.1 C12.1@94.488,44.727 ; U12.1 101.347,78.771 C22.1@97.61,75.034 ; U3.6 106.909,104.775 107.442,104.775 ; U3.8 106.82,106.54 106.807,106.553 107.002,106.553 107.417,106.968 109.96,106.968 110.109,106.819 110.109,106.438 109.631,105.96 109.609,105.96 109.313,105.664 U3.2 108.331,105.664 107.442,104.775 ; J3.2 110.009,71.828 107.696,74.141 107.696,76.962 ; 53.213,36.068 55.626,36.068 59.258,32.436 59.258,28.448 59.766,27.94 81.766,27.94 83.058,29.232 83.058,36.322 82.042,37.338 ; 82.042,37.338 91.361,37.338 94.488,40.465 C12.1@94.488,44.727 ; C20.1@91.26,75.034 C21.1 C22.1 C22.1@97.61,75.034 ; C22.1@97.61,75.034 105.768,75.034 107.696,76.962 ; 107.442,104.775 109.22,102.997 111.633,102.997 112.014,102.616 112.014,97.028 109.601,94.615 v1(109.601,92.71) 107.696,90.805 107.696,76.962
  Bottom Layer w0.254: v1(99.568,57.277) 101.6,57.277 109.601,65.278 v1(109.601,92.71)
3V3_Reg: C13.1 U2.2 U2.4 U4.1 U4.3 | length 80.7
  Top Layer w0.254: C13.1 55.141,72.54 57.023,74.422 57.023,89.281 65.278,97.536 65.278,102.025 65.278,102.035 65.278,102.73 U4.1 68.961,106.045 68.961,99.695 61.891,92.625 61.891,92.414 64.135,90.17 67.31,90.17 69.215,88.265 69.215,84.836 ; U2.2 65.632,84.836 69.215,84.836 ; U2.4 71.528,84.836 69.215,84.836
5V_ext: C5.2 D3.1 U1.1 U1.3 | length 43.4
  Top Layer w0.254: C5.2@96.139,62.876 C5.2 ; C5.2@96.404,62.586 97.395,61.595 103.632,61.595 105.831,59.396 105.831,54.767 103.271,52.207 103.271,51.074 100.711,48.514 100.48,48.514 100.391,48.425 U1.1 100.336,48.188 100.336,48.425 100.336,48.889 100.076,49.149 98.806,49.149 98.546,48.889 98.546,48.188 U1.3 ; C5.2@96.404,62.636 97.395,63.627 107.603,63.627 109.508,61.722 109.855,61.722 109.904,61.673 D3.1
CLK: MD1.20
CMD: MD1.19
D+: *1.5 D1.2 USB-C1.A6 USB-C1.B6 | length 94.1
  Top Layer w0.254: *1.5 39.245,36.39 40.318,36.39 42.291,34.417 42.291,31.496 46.736,27.051 91.313,27.051 100.203,35.941 100.203,38.735 ; D1.2 102.632,44.375 99.941,41.684 99.941,38.997 100.203,38.735 ; USB-C1.B6 108.367,44.669 108.951,44.669 109.173,44.447 109.173,43.937 109.024,43.788 108.865,43.788 108.769,43.692 USB-C1.A6 106.582,43.692 105.384,42.494 105.384,42.265 103.216,40.097 102.987,40.097 101.625,38.735 100.203,38.735
D-: *1.6 D1.3 USB-C1.A7 USB-C1.B7 | length 108.8
  Top Layer w0.254: v1(35.687,31.242) 35.687,33.528 37.338,35.179 *1.6 ; D1.3 104.632,45.831 104.648,45.847 104.643,45.847 100.322,41.526 100.322,39.429 100.471,39.28 101.631,39.28 101.933,39.582 101.933,40.211 v1(103.924,42.202) 105.914,44.192 USB-C1.A7 ; v1(105.283,40.386) 105.558,40.386 106.193,41.021 106.193,41.931 107.454,43.192 USB-C1.B7
  Bottom Layer w0.254: v1(35.687,31.242) 39.243,27.686 92.583,27.686 104.951,40.054 104.98,40.054 105.029,40.005 105.283,40.259 v1(105.283,40.386) 105.283,40.614 103.924,41.974 v1(103.924,42.202)
DTR: *1.13 Q1.2 R7.2 | length 16.7
  Top Layer w0.254: Q1.2 47.617,44.389 47.188,43.96 47.188,43.621 46.668,43.101 46.329,43.101 45.9,42.672 44.421,42.672 43.434,41.685 43.434,39.101 44.816,37.719 *1.13 49.657,37.719 R7.2
EN: C9.2 MD1.3 Q2.3 R5.1 S2.1 | length 91.8
  Top Layer w0.254: Q2.3 54.979,38.223 54.979,37.858 57.531,35.306 v1(60.325,35.306) ; v1(73.279,36.703) 75.184,38.608 MD1.3 81.153,38.862 v1(87.503,38.862) 85.369,40.996 85.369,43.459 87.376,45.466 88.392,45.466 88.891,45.965 R5.1 89.357,54.441 89.357,54.94 90.433,56.016 90.433,56.894 C9.2 ; v1(104.267,34.925) 106.807,34.925 107.939,36.057 S2.1
  Bottom Layer w0.254: v1(60.325,35.306) 71.882,35.306 v1(73.279,36.703) ; v1(87.503,38.862) 93.921,38.862 98.149,43.091 104.292,43.091 106.172,41.21 106.172,36.83 v1(104.267,34.925)
EN_L: J8.3 MD1.11 | length 106.7
  Top Layer w0.254: J8.3 49.892,94.85 46.736,91.694 46.736,87.122 49.911,83.947 49.911,83.058 47.244,80.391 47.244,69.85 53.594,63.5 64.389,63.5 67.056,66.167 67.056,73.831 68.304,75.079 68.326,75.057 71.12,75.057 72.009,74.168 72.009,49.53 74.676,46.863 77.089,46.863 78.994,48.768 MD1.11
GND: *1.1 C1.1 C2.1 C3.1 C4.1 C5.1 C6.1 C7.1 C9.1 C10.1 C12.2 C13.2 C14.2 C15.2 C20.2 C21.2 C22.2 D1.1 J3.1 J3.S1 J3.S2 J8.2 MD1.1 MD1.15 MD1.38 MD1.39 P?.9 R1.1 R2.1 R3.1 R4.1 R?.1 S1.2 S2.2 U1.2 U2.1 U3.1 U3.5 U3.7 U4.5 U10.3 U11.3 U12.3 USB-C1.A1 USB-C1.A12 USB-C1.B1 USB-C1.B12 USB-C1.S1@113.089,39.622 USB-C1.S2@108.909,39.622 USB-C1.S3 USB-C1.S4 | length 64.6
  Top Layer w0.254: C13.2 49.888,75.542 49.911,75.565 C13.2@50.038,75.438 ; U4.5 81.153,98.603 81.153,93.726 82.296,92.583 v1(87.63,92.583) 103.737,92.583 111.125,99.971 111.125,101.849 110.485,102.489 108.468,102.489 106.913,104.044 U3.5 106.724,104.14 106.299,104.14 105.791,104.648 105.791,105.156 106.176,105.541 106.79,105.541 107.167,105.918 107.315,105.918 107.861,106.464 U3.1 ; C14.2 C14.2@91.717,47.752 ; C10.1 94.579,54.32 C10.1@94.742,54.483 ; C7.1 C7.1@94.742,56.885 ; C12.2@94.742,47.752 94.765,47.729 C12.2 ; R1.1@99.06,37.17 R1.1 ; R2.1 R2.1@99.101,40.335 ; U1.2@99.314,47.752 U1.2@99.352,47.752 ; D1.1 102.632,47.336 D1.1@102.855,47.113 ; C4.1 C4.1@106.022,51.828 ; USB-C1.B12@108.344,40.892 USB-C1.A1 108.769,40.592 USB-C1.A1@108.792,40.569 ; USB-C1.B1@108.344,46.992 108.333,46.992 108.344,47.003 USB-C1.A12 108.769,47.292 USB-C1.A12@108.792,47.315 ; USB-C1.S3@108.359,48.262 USB-C1.S3 USB-C1.S3@108.792,48.145 ; USB-C1.S2@108.613,39.326 108.909,39.622 108.909,39.808 USB-C1.S2@108.792,39.925 ; USB-C1.S4@112.778,48.262 112.903,48.387 113.028,48.262 USB-C1.S4 ; USB-C1.S1@113.089,39.622 113.089,39.81 113.157,39.878 USB-C1.S1@113.089,39.946
IO0: C4.2 MD1.25 Q1.3 S1.1 | length 87.5
  Top Layer w0.254: Q1.3 v1(53.721,45.339) ; MD1.25 MD1.25@64.449,52.578 ; v1(66.65,59.157) 68.326,57.48 68.326,53.34 67.564,52.578 MD1.25@64.449,52.578 ; v1(66.929,47.498) 66.929,50.098 MD1.25@64.449,52.578 ; v1(103.759,62.738) 104.648,62.738 107.199,60.187 C4.2 109.928,52.451 S1.1
  Bottom Layer w0.254: v1(53.721,45.339) 53.975,45.339 53.975,45.593 55.88,47.498 v1(66.929,47.498) ; v1(66.65,59.157) 70.231,62.738 v1(103.759,62.738)
IO2: MD1.24 pad.5 | length 63.4
  Top Layer w0.254: v1(46.609,82.55) 45.974,81.915 45.974,69.596 61.722,53.848 MD1.24
  Bottom Layer w0.254: v1@46.609,82.423 v1(46.609,82.55) 46.609,97.155 51.943,102.489 55.371,102.489 pad.5
IO4: J8.4 MD1.26 | length 63.2
  Top Layer w0.254: J8.4 50.019,97.39 44.45,91.821 44.45,68.326 61.468,51.308 MD1.26
IO5: MD1.29 pad.4 | length 75.6
  Top Layer w0.254: v1(42.926,81.153) 42.926,66.802 62.23,47.498 MD1.29
  Bottom Layer w0.254: v1(42.926,81.153) 42.862,81.153 42.926,81.216 42.926,97.917 50.038,105.029 55.371,105.029 pad.4
IO12: MD1.14 P?.2 | length 72.3
  Top Layer w0.254: v1(75.819,47.752) 75.819,50.724 77.673,52.578 MD1.14
  Bottom Layer w0.254: P?.2 31.369,52.56 42.603,41.326 70.028,41.326 72.826,44.124 72.826,44.759 v1(75.819,47.752)
IO13: MD1.16 P?.4 | length 59.5
  Top Layer w0.254: MD1.16 82.372,55.118 v1(82.626,54.864)
  Bottom Layer w0.254: P?.4 32.588,65.202 47.473,65.202 59.715,52.959 67.945,52.959 69.85,54.864 v1(82.626,54.864)
IO14: MD1.13 P?.6 | length 62.2
  Top Layer w0.254: v1(77.419,50.546) 77.648,50.546 78.41,51.308 MD1.13
  Bottom Layer w0.254: P?.6 30.15,67.742 30.15,65.481 30.48,65.151 31.805,65.151 32.575,64.381 32.575,62.992 33.261,62.306 48.87,62.306 60.858,50.317 68.79,50.317 69.018,50.546 v1(77.419,50.546)
IO15: MD1.23 P?.8 | length 45.2
  Top Layer w0.254: MD1.23 66.167,55.118 v1@66.421,55.372
  Bottom Layer w0.254: P?.8 32.588,70.282 37.236,70.282 38.125,71.171 51.13,71.171 v1(66.675,55.626)
IO16: MD1.28
IO17: MD1.27
IO18: J8.5 MD1.30 | length 73
  Top Layer w0.254: J8.5 50.527,99.93 41.021,90.424 41.021,67.437 62.23,46.228 MD1.30
IO19: MD1.31 pad.2 | length 82.8
  Top Layer w0.254: pad.2 39.751,94.431 39.751,67.056 61.778,45.029 63.828,45.029 MD1.31
IO21: J3.3 MD1.33 U3.3 | length 131.6
  Top Layer w0.254: MD1.33 65.481,42.418 v1(66.523,43.459) ; U3.3 111.925,104.864 114.3,102.489 114.3,95.377 v1(112.268,93.345) 112.268,74.137 111.029,72.898 110.617,72.898 110.547,72.828 J3.3
  Bottom Layer w0.254: v1(66.523,43.459) 71.958,48.895 81.534,48.895 89.408,41.021 90.678,41.021 112.268,62.611 v1(112.268,93.345)
IO22: J3.4 MD1.36 U3.4 | length 123.1
  Top Layer w0.254: MD1.36 65.481,38.608 v1(67.031,40.157) ; v1(86.868,41.631) 89.662,41.631 v1(90.678,42.647) ; U3.4 111.709,104.064 113.157,102.616 113.157,96.266 v1(111.252,94.361) 110.49,93.599 110.49,75.184 110.484,75.178 J3.4
  Bottom Layer w0.254: v1(67.031,40.157) 85.395,40.157 v1(86.868,41.631) ; v1(90.678,42.647) 111.252,63.221 v1(111.252,94.361)
IO23: MD1.37 pad.3 | length 105.5
  Top Layer w0.254: pad.3 56.486,107.54 57.277,108.331 57.277,111.242 56.632,111.887 54.102,111.887 38.1,95.885 38.1,67.183 56.134,49.149 56.134,37.846 57.658,36.322 59.643,36.322 60.659,37.338 MD1.37
IO25: MD1.10 P?.10 | length 88.7
  Top Layer w0.254: v1(69.723,72.822) 69.917,72.627 69.917,72.225 69.977,72.165 69.977,41.326 71.425,39.878 76.759,39.878 78.537,41.656 78.537,46.787 79.248,47.498 MD1.10
  Bottom Layer w0.254: P?.10 31.369,73.152 31.699,72.822 v1(69.723,72.822)
IO27: MD1.12 U10.4 | length 42.9
  Top Layer w0.254: v1(76.962,69.596) 84.709,61.849 84.709,53.298 81.576,50.165 81.534,50.165 81.407,50.038 MD1.12 ; v1(82.55,75.819) 82.55,76.073 82.804,76.327 82.804,83.556 84.202,84.954 U10.4
  Bottom Layer w0.254: v1@77.294,69.899 77.294,69.928 82.55,75.184 v1(82.55,75.819)
IO32: MD1.8 P?.3 | length 72.7
  Top Layer w0.254: MD1.8 82.296,44.958 83.896,46.558 83.896,47.488 84.43,48.021 v1(84.43,49.225)
  Bottom Layer w0.254: P?.3 39.675,66.421 43.713,70.46 47.981,70.46 64.287,54.153 67.869,54.153 70.383,56.667 82.296,56.667 84.43,54.534 v1(84.43,49.225)
IO33: MD1.9 P?.5 | length 70.2
  Top Layer w0.127: P?.5@33.782,69.088 P?.5
  Top Layer w0.254: v1(32.639,59.182) 32.639,67.564 33.782,68.707 P?.5@33.782,69.088 ; MD1.9 82.398,46.228 82.906,46.736 v1(82.906,49.225)
  Bottom Layer w0.254: v1(32.639,59.182) 32.704,59.182 33.39,59.868 46.076,59.868 56.413,49.53 82.326,49.53 82.631,49.225 v1(82.906,49.225)
IO34: MD1.6 R?.2 U4.4 U4.6 | length 103.2
  Top Layer w0.254: R?.2 61.341,65.913 61.468,66.04 65.129,66.04 65.278,66.189 65.278,74.93 69.469,79.121 77.851,79.121 79.629,80.899 ; U4.4 77.908,99.511 79.629,97.79 79.629,80.899 ; MD1.6 81.153,42.418 81.28,42.291 81.322,42.291 87.545,48.514 87.608,48.514 87.608,60.601 79.629,68.58 79.629,80.899
  Bottom Layer w0.254: U4.4 75.489,99.517 75.489,106.223 U4.6
IO35: MD1.7 P?.7 | length 73
  Top Layer w0.254: MD1.7 82.138,43.688 84.658,46.208 84.658,47.396 85.471,48.209 85.471,52.476 v1(86.36,53.365)
  Bottom Layer w0.254: P?.7 35.001,71.501 35.484,71.984 52.07,71.984 66.142,57.912 81.813,57.912 v1(86.36,53.365)
NetD2_1: D2.1 R4.2 | length 2.4
  Top Layer w0.254: D2.1 102.517,56.388 104.648,56.388 104.664,56.404 R4.2
NetQ1_1: Q1.1 R6.1 | length 3.3
  Top Layer w0.254: Q1.1@49.369,46.289 Q1.1 49.469,46.289 49.742,46.562 49.742,46.939 50.787,47.984 50.787,48.134 51.285,48.632 R6.1
NetQ2_1: Q2.1 R7.1 | length 3.3
  Top Layer w0.254: R7.1 50.047,39.37 52.451,39.37 52.512,39.431 Q2.1
NetR1_2: R1.2 USB-C1.A5 | length 11
  Top Layer w0.254: R1.2 104.521,37.211 106.807,39.497 106.807,41.91 107.493,42.596 107.823,42.596 107.896,42.669 108.321,42.669 USB-C1.A5
NetR2_2: R2.2 USB-C1.B5 | length 10.2
  Top Layer w0.254: R2.2 101.219,40.259 101.219,40.677 102.473,41.931 102.473,42.656 104.255,44.438 104.98,44.438 106.234,45.692 USB-C1.B5
NetU10_2: U10.2 U11.4 | length 7.8
  Top Layer w0.254: U10.2 87.593,80.354 87.63,80.391 87.63,80.782 87.825,80.977 88.861,80.977 92.838,84.954 U11.4
NetU11_2: U11.2 U12.4 | length 7.6
  Top Layer w0.254: U11.2 96.138,80.654 100.115,84.631 101.024,84.631 101.347,84.954 U12.4
RTS: *1.14 Q2.2 R6.2 | length 30.4
  Top Layer w0.254: *1.14 45.269,39.116 44.196,39.116 43.815,39.497 43.815,41.527 44.579,42.291 53.403,42.291 ; R6.2 52.823,50.682 55.118,48.387 55.118,44.006 53.403,42.291 ; Q2.2 52.994,37.804 53.254,37.804 53.425,37.975 53.425,39.936 53.403,39.958 53.403,42.291
RXD0: *1.2 MD1.34 | length 25.1
  Top Layer w0.254: *1.2 v1(41.148,40.259) ; v1(60.096,40.259) 60.985,41.148 MD1.34
  Bottom Layer w0.254: v1(41.148,40.259) v1(60.096,40.259)
SD0: MD1.21
SD1: MD1.22
SD2: MD1.17
SD3: MD1.18
TXD0: *1.3 MD1.35 | length 28.3
  Top Layer w0.254: *1.3 40.997,38.989 43.029,36.957 v1(43.053,36.957) ; v1(58.801,37.973) 59.851,39.023 60.486,39.023 61.341,39.878 MD1.35
  Bottom Layer w0.254: v1(43.053,36.957) 44.958,35.052 55.88,35.052 v1(58.801,37.973)
VBUS: C3.2 C15.1 D1.4 D3.2 J8.1 R3.2 U2.3 U4.2 USB-C1.A4 USB-C1.A9 USB-C1.B4 USB-C1.B9 | length 203.6
  Top Layer w0.254: J8.1 55.4,89.69 55.753,90.043 56.388,90.043 64.516,98.171 64.516,104.14 66.421,106.045 66.421,107.696 67.056,108.331 71.374,108.331 73.406,106.299 73.406,104.394 74.316,103.484 74.316,100.583 ; C15.1 C15.1@60.729,83.335 ; U4.2 65.659,101.143 65.659,97.155 61.341,92.837 61.341,92.202 63.933,89.61 66.092,89.61 67.564,88.138 67.564,86.868 66.675,85.979 64.262,85.979 61.891,83.608 61.002,83.608 C15.1@60.729,83.335 ; D1.4 104.682,47.686 105.876,46.492 108.344,46.492 USB-C1.A9@108.321,46.515 ; USB-C1.B9 108.367,41.715 108.951,41.715 110.109,42.873 110.109,45.011 ; USB-C1.B4 108.769,46.192 108.865,46.096 109.024,46.096 110.109,45.011 ; C3.2 C3.2@112.477,58.629 ; C15.1@60.729,83.335 61.191,83.335 61.341,83.185 61.341,82.901 62.073,82.169 64.758,82.169 64.907,82.318 64.907,82.34 65.23,82.663 U2.3 65.745,82.423 73.914,82.423 77.978,86.487 77.978,93.345 74.316,97.007 74.316,100.583 ; 74.316,100.583 74.825,101.092 75.946,101.092 76.708,100.33 78.232,100.33 80.391,98.171 80.391,84.01 81.153,83.248 81.153,69.088 85.471,64.77 109.41,64.77 112.839,61.341 D3.2 112.854,59.006 C3.2@112.477,58.629 ; 110.109,45.011 111.088,45.99 111.088,54.31 112.456,55.678 R3.2 112.456,55.941 112.522,56.007 112.522,58.583 C3.2@112.477,58.629
VN: MD1.5
VP: MD1.4
pads on no net: *1.7 *1.8 *1.9 *1.10 *1.11 *1.12 *1.15 J10.1 J10.2 J10.3 J10.4 J10.5 MD1.32 S1.MH1 S1.MH2 S2.MH1 S2.MH2 U1.4 U12.2 USB-C1.A8 USB-C1.B8 USB-C1.S1@113.081,48.26 USB-C1.S1@113.106,39.624 USB-C1.S2@108.89,39.624 USB-C1.S2@108.89,48.26 USB-C1.Un1 USB-C1.Un2

## Polygon pours and split planes (outlines as drawn)
GND on Bottom Layer "GND_L02_P001" (solid, pour order 1): 25.4,115.316 25.4,25.4 116.459,25.4 116.459,115.316
GND on Top Layer "GND_L01_P003" (solid, pour order 3): 25.4,115.316 25.4,25.4 116.459,25.4 116.459,115.316

## Other copper
Multi-Layer:
  pour cut-out: 103.632,113.411 104.902,112.141 104.902,102.108 115.57,102.108 115.57,113.411
  pour cut-out: 62.103,112.522 62.103,94.869 63.246,93.726 82.55,93.726 82.804,93.98 82.804,112.141 81.915,113.03 62.738,113.03 62.23,112.522

## Silkscreen, mask and mechanical layers (free items; w line width, h text height)
Top Overlay:
  text "Designed by / Alexander Sactic / DYCDE / V1.0" at 85.725,27.559 h1

## Text inside footprints (layer, text, board x,y; h text height)
U1: Top Overlay "*" at 100.696,48.704 h1.27 r270; Mechanical 13 "*" at 99.604,47.631 h1.27 r270